# Altium PCB Main.PcbDoc
Units mm, origin at the board's own origin, x right, y up, seen from the top; angles counter-clockwise.
Board outline 50 x 50 mm, 2 copper layers (Top Layer, Bottom Layer), stack 1.135 mm thick; 24 components, 12 nets, 56 pads, 5 vias.
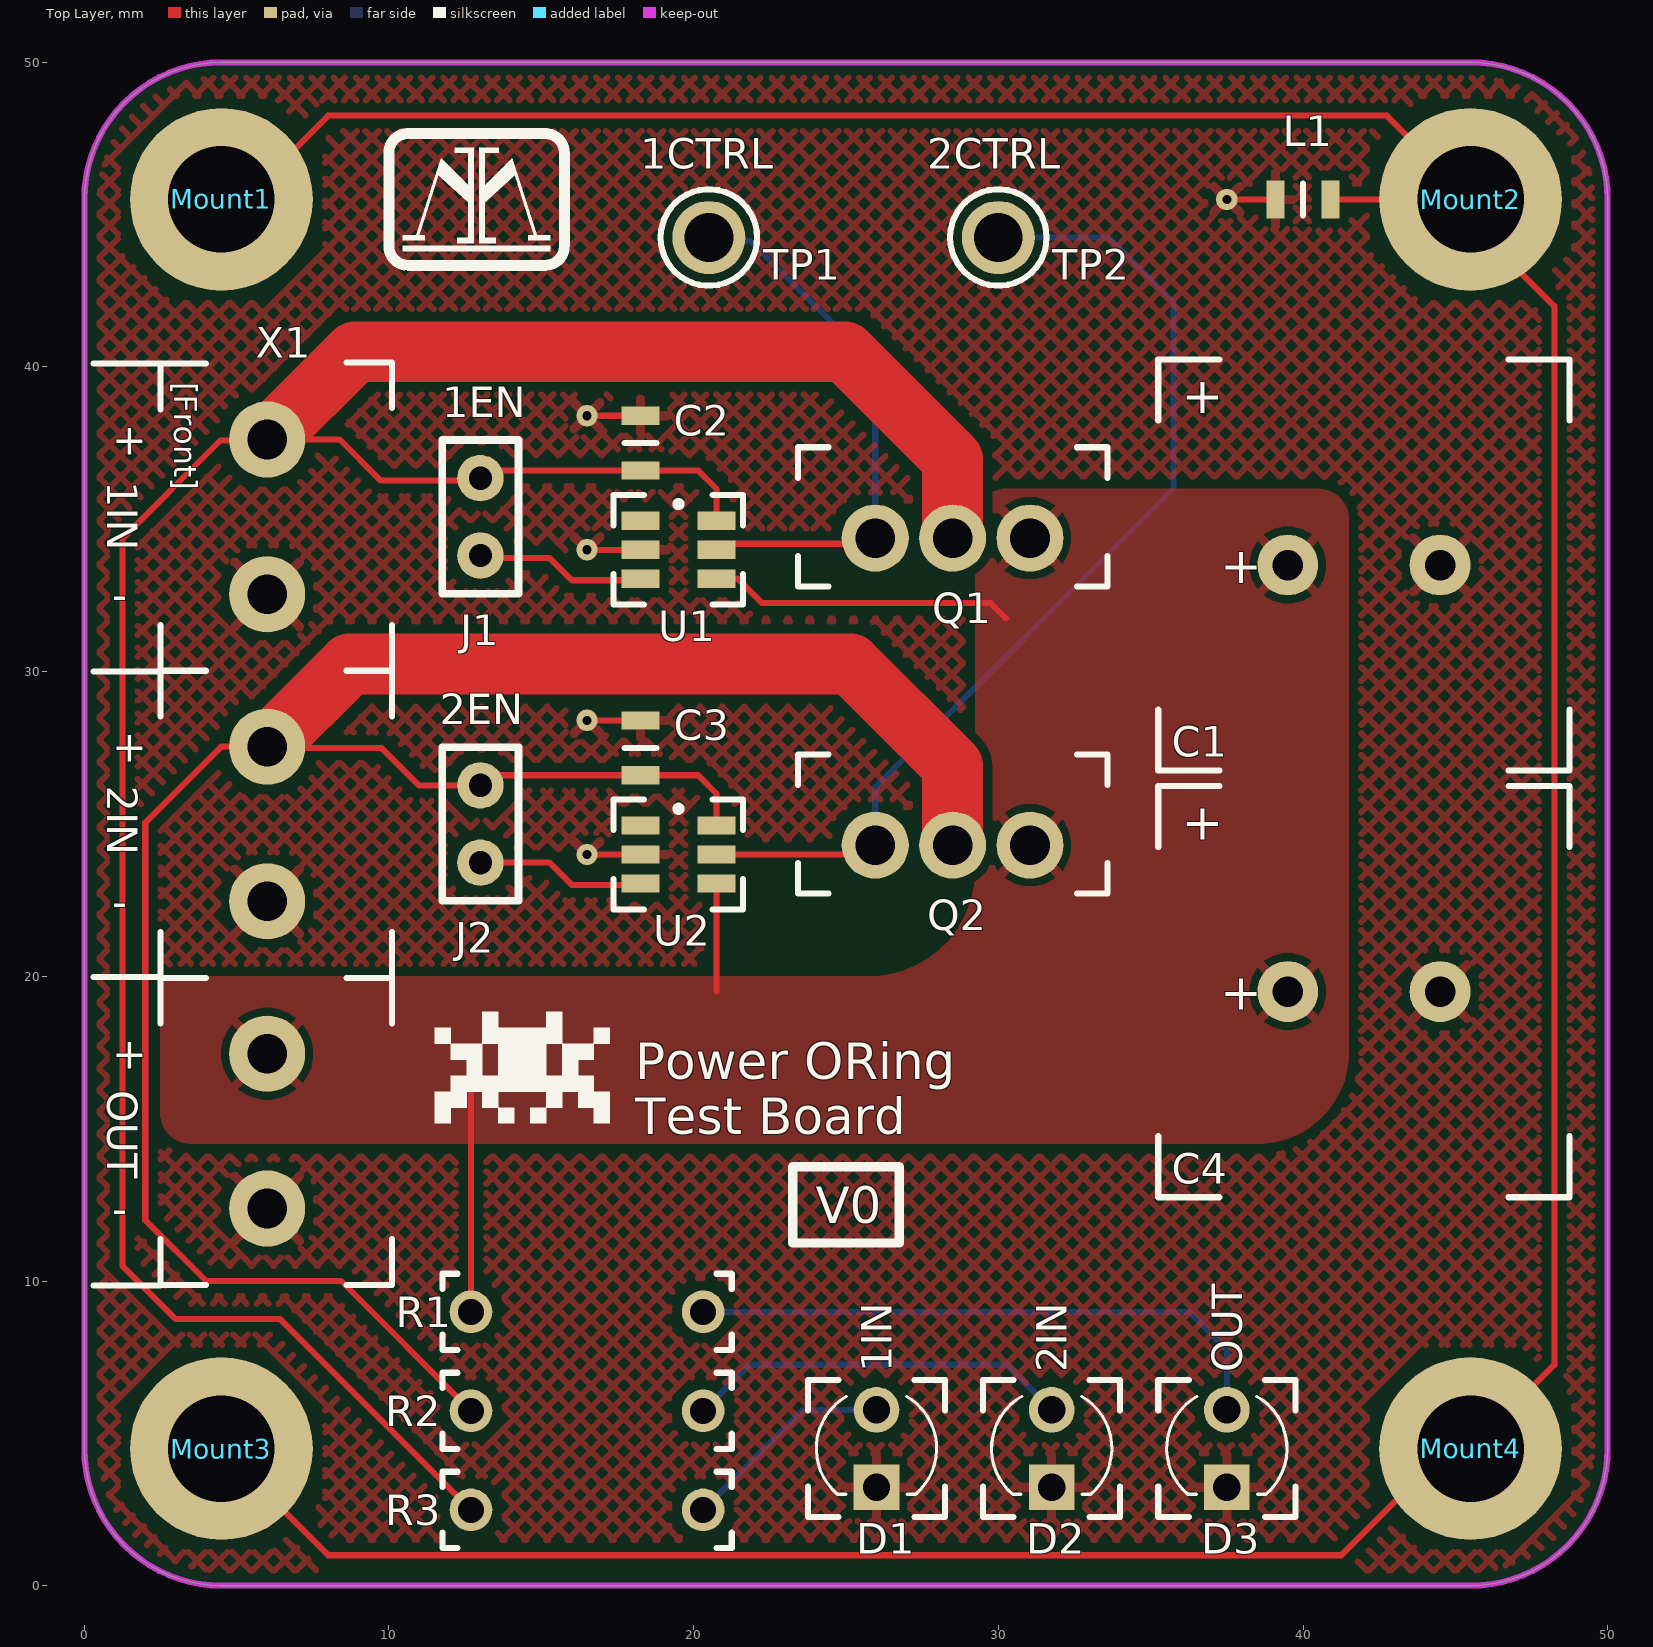
[diagram p0: Top Layer view]
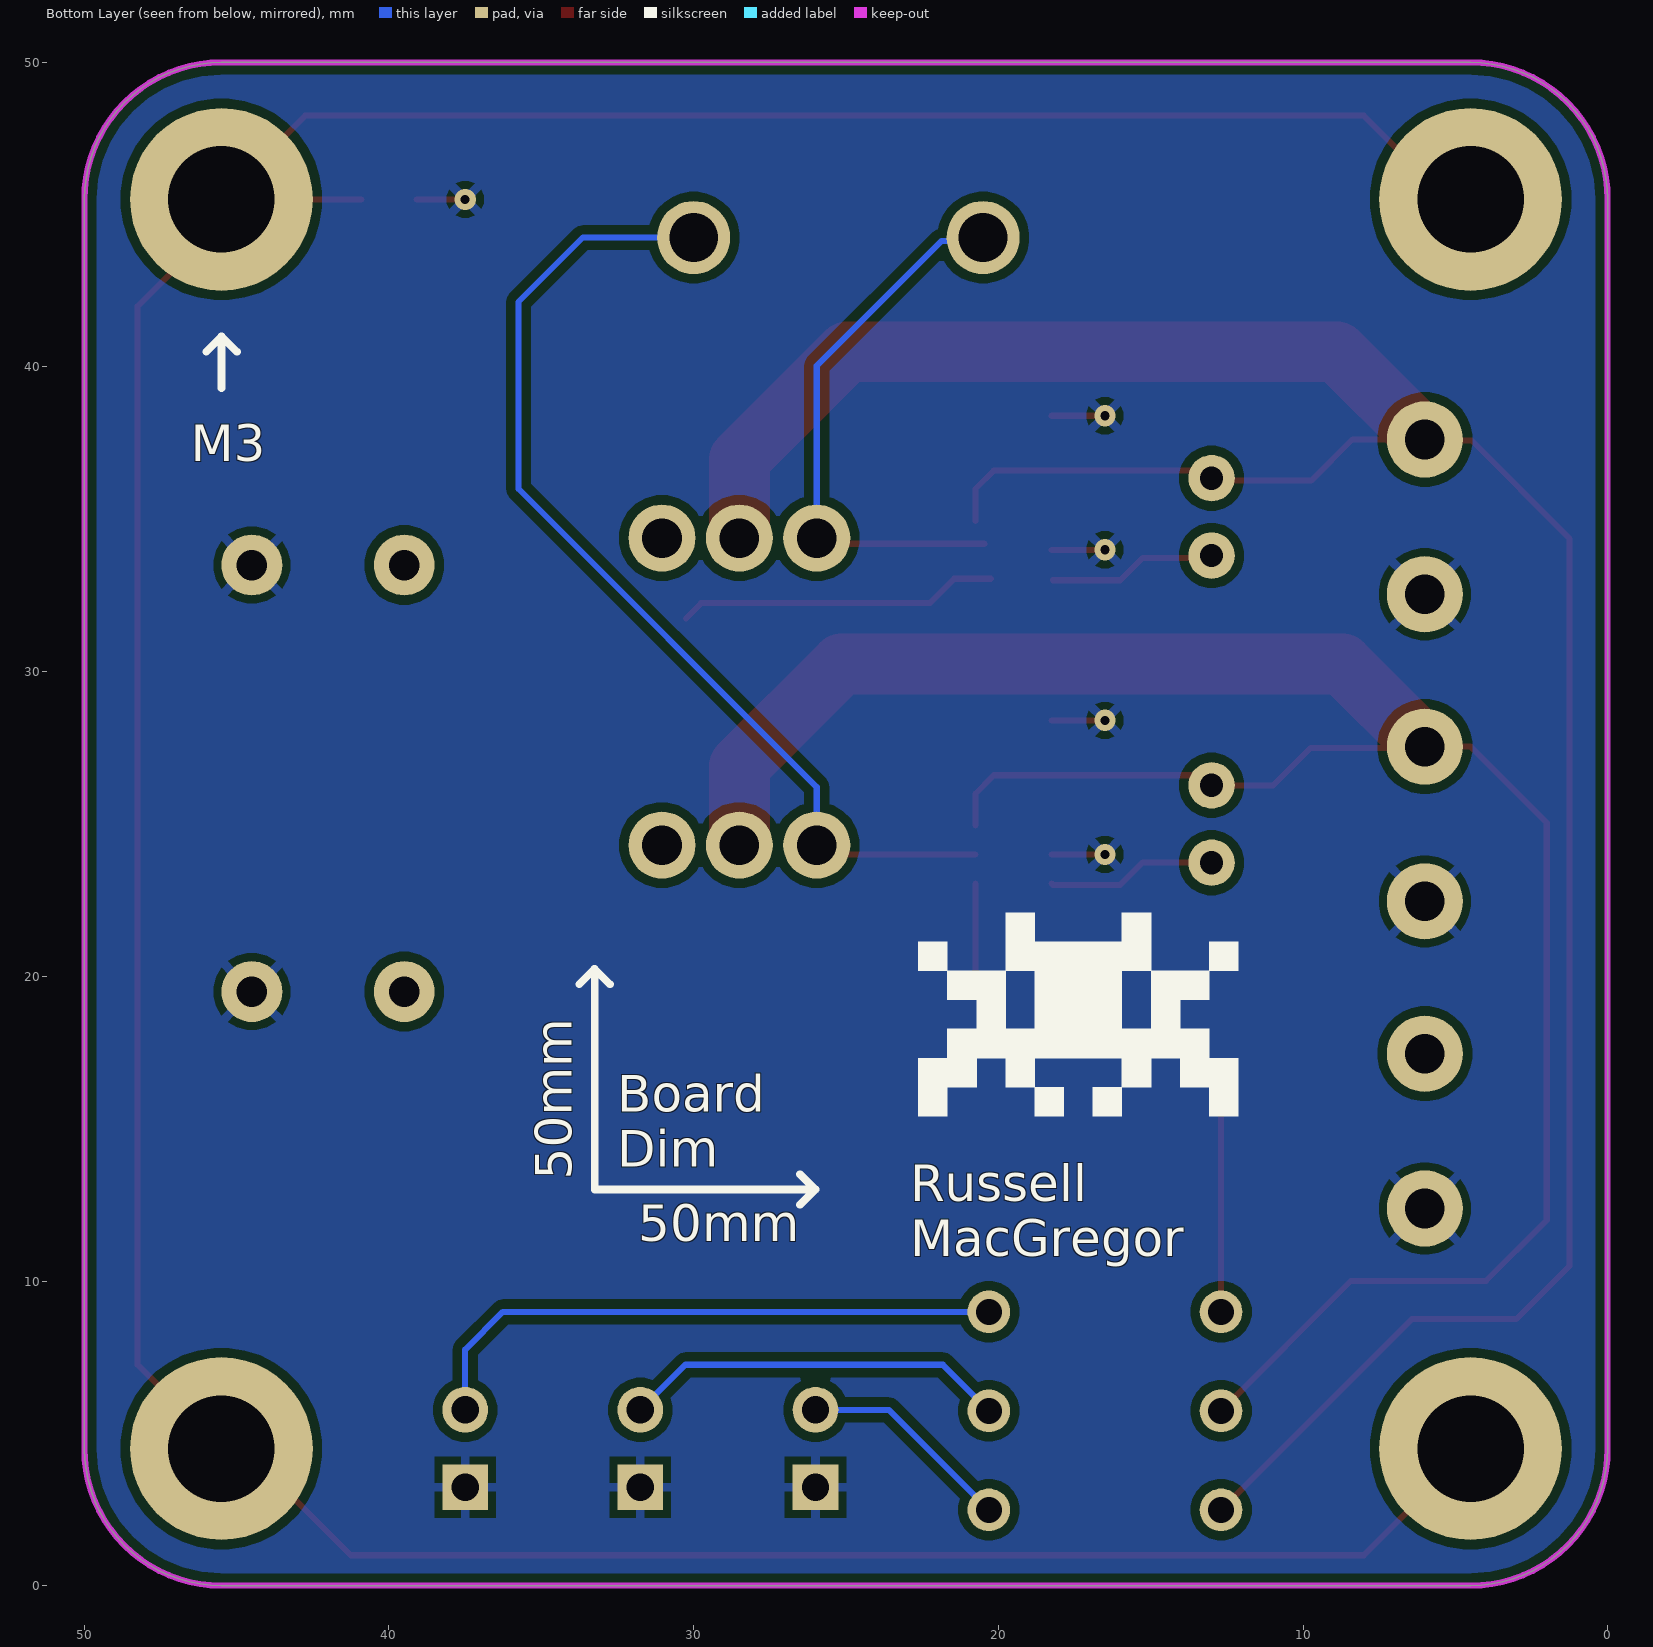
[diagram p1: Bottom Layer view, seen from below]

## Layer stack, top to bottom
Top Solder: solder mask 0.0102, Solder Resist, Dk 3.8
Top Layer: signal copper 0.035
Dielectric 1: dielectric 1.065, FR-4, Dk 4.8
Bottom Layer: signal copper 0.035
Bottom Solder: solder mask 0.0102, Solder Resist, Dk 3.8

## Board outline
4.5,0 cw(c4.5,4.5) 0,4.5 0,45.5 cw(c4.5,45.5) 4.5,50 45.5,50 cw(c45.5,45.5) 50,45.5 50,4.5 cw(c45.5,4.5) 45.5,0

## Design rules (kind name [scope] priority, off if disabled: settings)
BoardOutlineClearance [All] p1: gap=0.2 ignorepadtopadclearanceinfootprint=FALSE
Clearance "inPolygon Clearance" [InPolygon] p1: gap=0.3 ignorepadtopadclearanceinfootprint=TRUE // this rule ensures that every net within a polygon of a different net has a set clearance from the poly
Clearance "Different Diff Pair" [All] p2: gap=0.2 ignorepadtopadclearanceinfootprint=TRUE
Clearance "Same Diff Pair" [All] p3: gap=0.1 ignorepadtopadclearanceinfootprint=TRUE
Clearance "Different Nets" [not InAnyDifferentialPair] p4: gap=0.3 ignorepadtopadclearanceinfootprint=TRUE except(0.1: Arc-SMDPad Arc-THPad Arc-Via Arc-Text Track-SMDPad Track-THPad Track-Via Track-Text SMDPad-Text THPad-Text Via-Text Fill-Text Poly-Text Region-Text Text-Text; 0.12: Arc-Arc Arc-Track Track-Track; 0.15: SMDPad-SMDPad SMDPad-THPad SMDPad-Via THPad-THPad THPad-Via Via-Via; 0.2: Arc-Hole Track-Hole SMDPad-Hole THPad-Hole Via-Hole Fill-Hole Poly-Hole Region-Hole Text-Hole)
Clearance "Same Net" [not InAnyDifferentialPair] p5: gap=0 ignorepadtopadclearanceinfootprint=TRUE except(0.1: THPad-Via; 0.18: Arc-Arc Arc-Track Track-Track)
ComponentClearance [All] p1: gap=0.102 collisioncheckmode=3 verticalgap=0.102 showdistances=TRUE
DiffPairsRouting "Ethernet Routing" [InDifferentialPairClass('Ethernet_Pairs')] p1: maxlimit=0.2 minlimit=0.2 mostfreqgap=0.2 toplayer_minwidth=0.25 toplayer_maxwidth=0.25 toplayer_prefwidth=0.25 bottomlayer_minwidth=0.25 bottomlayer_maxwidth=0.25 bottomlayer_prefwidth=0.25 impedanceprofiledriven=TRUE maxuncoupledlength=12.7
DiffPairsRouting "USB Routing" [InDifferentialPairClass('USB_Pairs')] p2: maxlimit=0.127 minlimit=0.127 mostfreqgap=0.127 toplayer_minwidth=0.23 toplayer_maxwidth=0.23 toplayer_prefwidth=0.23 bottomlayer_minwidth=0.23 bottomlayer_maxwidth=0.23 bottomlayer_prefwidth=0.23 maxuncoupledlength=12.7
DiffPairsRouting "CAN Routing" [InDifferentialPairClass('CAN_Pairs')] p3: maxlimit=0.5 minlimit=0.5 mostfreqgap=0.5 toplayer_minwidth=0.201 toplayer_maxwidth=0.201 toplayer_prefwidth=0.201 bottomlayer_minwidth=0.201 bottomlayer_maxwidth=0.201 bottomlayer_prefwidth=0.201 impedanceprofiledriven=TRUE maxuncoupledlength=12.7
Height [All] p1: minheight=0 maxheight=1816.048 prefheight=12.7
HoleSize [All] p1: absolutevalues=TRUE maxlimit=6.3 minlimit=0.3 maxpercent=80.000 minpercent=20.000
HoleToHoleClearance [All] p1: gap=0.25 allowstackedmicrovias=FALSE
Length [All] p1: maxlimit=43.432 minlimit=0 usedelayunits=TRUE mindelay=0.000000 maxdelay=10000.000000
MatchedLengths "Diff Pair Matched Delays" [InDifferentialPairClass('Ethernet_Pairs') or InDifferentialPairClass('USB_Pairs') or InDifferentialPairClass('CAN_Pairs')] p1: tolerance=5 checknetsindiffpair=TRUE checkdiffpairvsdiffpair=FALSE checkxsignals=FALSE checkothers=FALSE usedelayunits=TRUE delaytolerance=100.000000
MinimumAnnularRing [All] p1: minimumring=0.2
MinimumSolderMaskSliver [All] p1: minsoldermaskwidth=0
PlaneClearance "Supply Net Clearance" [InNetClass('Supply_Nets')] p1: clearance=0.5
PlaneClearance "All Nets" [All] p2: clearance=0.3
PolygonConnect "Supply Nets" [InNetClass('Supply_Nets')] p1: connectstyle=Relief reliefconductorwidth=0.3 reliefentries=4 polygonreliefangle="90 Angle" conductorbypadedge=TRUE mindistance=0.381 enablemindistance=FALSE airgapwidth=0.254
PolygonConnect General [All] p2: connectstyle=Relief reliefconductorwidth=0.254 reliefentries=4 polygonreliefangle="90 Angle" airgapwidth=0.254
RoutingVias [All] p1: holewidth=0.2 width=0.35 viastyle="Through Hole" minholewidth=0.15 minwidth=0.3 maxholewidth=6.3 maxwidth=6.55
SilkToSilkClearance [All] p1: silktosilkclearance=0
SilkToSolderMaskClearance [All] p1: minsilkscreentomaskgap=0 clearancetoexposedcopper=TRUE
SolderMaskExpansion [All] p1: expansion=0.075 istentingtop=FALSE
SupplyNets "Schematic Supply Nets_3" [InNet('GND')] p1: voltage=0.000
SupplyNets "Schematic Supply Nets_1" [InNet('Earth')] p2: voltage=0.000
UnRoutedNet [All] p1: checkbadconnections=TRUE
Width "nRF Width" [InNetClass('nRF Signal')] p1: maxlimit=0.379 minlimit=0.379 preferedwidth=0.379 impedanceprofiledriven=TRUE minimp=50.000000 maximp=50.000000 favimp=50.000000 checkconnectedcopper=TRUE
Width [All] p2: maxlimit=100 minlimit=0.1 preferedwidth=0.3
20 further rules are at their usual default settings.

## Classes and differential pairs
net class Supply_Nets: "Batt1 EN" "Batt1 IN+" "Batt2 EN" "Batt2 IN+" "Batt OUT" Earth GND NetQ1_1 NetQ2_1

## Components (designator, comment, footprint, x,y, rotation, side; value= is the part's Value field where it differs from the comment)
C1 "[Cap] Thru-Hole 1000uF 20% 35V" "[Cap] Thru-Hole Polarized 10mm" 42,33.5 r0 top
C2 "[Cap] 0805 0.1uF 10% 50V" "[Cap] SMD 0805" 18.25,37.5 r90 top (schematic designator C4)
C3 "[Cap] 0805 0.1uF 10% 50V" "[Cap] SMD 0805" 18.25,27.5 r90 top (schematic designator C2)
C4 "[Cap] Thru-Hole 1000uF 20% 35V" "[Cap] Thru-Hole Polarized 10mm" 42,19.5 r0 top (schematic designator C3)
D1 "[LED] Thru-Hole 3mm Green" "[LED] Thru-Hole 3mm" 26,4.5 r270 top
D2 "[LED] Thru-Hole 3mm Green" "[LED] Thru-Hole 3mm" 31.75,4.5 r270 top
D3 "[LED] Thru-Hole 3mm Green" "[LED] Thru-Hole 3mm" 37.5,4.5 r270 top
J1 "[Jumper] Thru-Hole 2pin" "[Jumper] Thru-Hole 2pin" 13,33.81 r90 top
J2 "[Jumper] Thru-Hole 2pin" "[Jumper] Thru-Hole 2pin" 13,23.73 r90 top
L1 "652-MH2029-300Y" "[Ferrite] SMD 0805" 40,45.5 r180 top
Mount1 "M3 Mount Hole" "[Mount] M3 Mount Hole" 4.5,45.5 r0 top
Mount2 "M3 Mount Hole" "[Mount] M3 Mount Hole" 45.5,45.5 r0 top
Mount3 "M3 Mount Hole" "[Mount] M3 Mount Hole" 4.5,4.5 r0 top
Mount4 "M3 Mount Hole" "[Mount] M3 Mount Hole" 45.5,4.5 r0 top
Q1 "NMOS" "[NMOS] Thru-Hole 40V 200A" 28.5,34.385 r0 top
Q2 "NMOS" "[NMOS] Thru-Hole 40V 200A" 28.5,24.305 r0 top
R1 "[220] Thru-Hole 5% 1/4W" "[Res] Thru-Hole 1/4W" 16.5,8.988 r0 top (schematic designator R3)
R2 "[220] Thru-Hole 5% 1/4W" "[Res] Thru-Hole 1/4W" 16.5,5.738 r0 top
R3 "[220] Thru-Hole 5% 1/4W" "[Res] Thru-Hole 1/4W" 16.5,2.488 r0 top (schematic designator R1)
TP1 "[THM] Thru-Hole" "[THM] White" 20.5,44.25 r0 top
TP2 "[THM] Thru-Hole" "[THM] White" 30,44.25 r0 top
U1 "[ORing] NMOS Controller" "[ORing] NMOS Controller" 19.5,34 r0 top
U2 "[ORing] NMOS Controller" "[ORing] NMOS Controller" 19.5,24 r0 top
X1 "6pin Screw Terminal" "[Screw Terminal] 6pin 5mm" 6,25 r270 top

## Footprints (in the part's own frame and the unit in brackets; to place one, negate y for a bottom-side part, rotate by r counter-clockwise, add the part's x,y. Pads: shape width x height; smd on the part's side, far side on the other; paste and mask are expansions set on the pad)
"[Cap] SMD 0805" [mm]
  rect 0.6x1.25 smd: 1(-0.9,0) 2(0.9,0)
  silkscreen extent 0,-0.53 0,0.53, body extent -1,-0.63 1,0.63, height 1
"[Cap] Thru-Hole Polarized 10mm" [mm]
  round 2 hole 1: 1(-2.5,0) 2(2.5,0)
  silkscreen extent -6.75,-6.75 6.75,6.75, body extent -6.5,-6.49 6.5,6.49, height 26.5
"[Ferrite] SMD 0805" [mm]
  rect 0.6x1.25 smd: 1(-0.9,0) 2(0.9,0)
  silkscreen extent 0,-0.53 0,0.53, body extent -1,-0.6 1,0.6, height 1.1
"[Jumper] Thru-Hole 2pin" [mil]
  round 60 hole 30: 1(0,0) 2(100,0)
  silkscreen extent -49,-49 149,49, body extent -50,-50 150,50, height 374
"[LED] Thru-Hole 3mm" [mm]
  round 1.5 hole 0.9: 1(-1.27,0)
  rect 1.5x1.5 hole 0.9: 2(1.27,0)
  silkscreen extent -2.25,-2.25 2.25,2.25, body extent -1.9,-1.92 1.68,1.92, height 5.6
"[Mount] M3 Mount Hole" [mm]
  round 6 hole 3.5: 1(0,0)
"[NMOS] Thru-Hole 40V 200A" [mm] "CSD18510KCS"
  round 2.2 hole 1.3: 1(-2.54,0) 2(0,0) 3(2.54,0)
  silkscreen extent -5.08,-1.59 5.08,2.98, body extent -5.08,-1.59 5.08,2.98, height 19.35
"[ORing] NMOS Controller" [mm]
  rect 1.25x0.6 smd: 1(-1.25,0.95) 2(-1.25,0) 3(-1.25,-0.95) 4(1.25,-0.95) 5(1.25,0) 6(1.25,0.95)
  silkscreen extent -2.12,-1.8 2.12,1.8, body extent -1.38,-1.5 1.38,1.5, height 1.1
"[Res] Thru-Hole 1/4W" [mm]
  round 1.4 hole 0.85: 1(-3.81,0) 2(3.81,0)
  silkscreen extent -4.75,-1.25 4.75,1.25, body extent -4.11,-1.19 4.11,1.19, height 2.7
"[Screw Terminal] 6pin 5mm" [mm]
  round 2.5 hole 1.3: 1(-12.62,0) 2(-7.54,0) 3(-2.54,0) 4(2.54,0) 5(7.54,0) 6(12.62,0)
  silkscreen extent -15.15,-3.5 15.13,4.1, body extent -15.53,-3.5 15.13,4.1, height 9.99
"[THM] White" [mm] "5012"
  round 2.4 hole 1.6: 1(0,0)
  silkscreen extent -1.59,-1.58 1.59,1.58, body extent -1.58,-1.59 1.58,1.59, height 8.12

## Part data
C1 C4: "35PK1000MEFC10X20", Capacitance=1000uF, Max Voltage=35V, Size Package=Thru-Hole, Supplier Part Number 1=399-9886-1-ND, Tolerance=20%, Supplier 1=DigiKey
C2 C3: "CL21B104KBCNNNC", Capacitance=100nF, Max Voltage=50V, Size Package=0805, Supplier Part Number 1=1276-1003-6-ND, Tolerance=10%, Supplier 1=DigiKey
D1 D2 D3: "151031VS06000", Color=Green, Supplier Part Number 1=732-5008-ND, Lens Diameter=3mm, Supplier 1=DigiKey
L1: library part "[Ferrite] SMD 0805 3A 30ohm", Res @ Freq="30 @ 100MHz", Size Package=0805, Supplier Part Number 1=MH2029-300YCT-ND, Supplier 1=DigiKey
Mount1 Mount2 Mount3 Mount4: library part "[Mount] M3 Mount Hole", "Place at least 4.5mm from board edge. Plated."
Q1 Q2: library part "[NMOS] Thru-Hole 40V 200A", "CSD18510KCS", Supplier Part Number 1=296-47695-ND, Supplier 1=DigiKey
R1 R2 R3: "CFR-25JR-52-220R", Resistance=220, Size Package=Thru-Hole, Supplier Part Number 1=13-CFR-25JR-52-220RCT-ND, Tolerance=5%, Supplier 1=DigiKey, Wattage=1/4W
TP1 TP2: "5012", Supplier Part Number 1=36-5012-ND, Supplier 1=DigiKey
U1 U2: "NCV68061SNAIT1G", Supplier Part Number 1=488-NCV68061SNAIT1GCT-ND, Supplier 1=DigiKey
X1: library part "[Screw Terminal] 6pin", "TB002-500-06BE", Supplier Part Number 1=102-6149-ND, Supplier 1=DigiKey

## Via types
v1: diameter 0.7, hole 0.3, Top Layer to Bottom Layer, 5 vias

## Nets (pads, with @x,y where several pads share a name; then routed paths per layer and width w, separated by ;. In a path a pad name is that pad's centre, name@x,y a point inside that pad or via, vN(x,y) a via of type N, cw(c..) or ccw(c..) an arc to the next point about the centre after c; other vN are vias at no path point)
"Batt1 EN": J1.1 U1.3 | length 5.5
  Top Layer w0.2: J1.1@13,33.73 15.27,33.73 16,33 U1.3@18.2,33
"Batt1 IN+": C2.1 J1.2 Q1.2 R3.1 U1.6 X1.1 | length 89.2
  Top Layer w0.2: R3.1 6.428,8.75 3,8.75 1.25,10.5 1.25,34.37 4.47,37.59 5.97,37.59 X1.1 8.38,37.62 9.73,36.27 J1.2@13,36.27 ; J1.2 13.25,36.6 C2.1 20.15,36.6 20.75,36 U1.6
  Top Layer w2: X1.1 8.88,40.5 24.966,40.5 28.5,36.966 Q1.2
"Batt2 EN": J2.1 U2.3 | length 5.6
  Top Layer w0.2: J2.1 15.27,23.73 16,23 18.2,23 U2.3
"Batt2 IN+": C3.1 J2.2 Q2.2 R2.1 U2.6 X1.3 | length 75.3
  Top Layer w0.2: R2.1 8.428,10 4,10 2,12 2,25.04 4.5,27.54 X1.3 6.04,27.5 9.75,27.5 10.98,26.27 J2.2 ; J2.2@13.358,26.27 13.688,26.6 C3.1 20.15,26.6 20.75,26 U2.6
  Top Layer w2: X1.3 8.71,30.25 25.151,30.25 28.5,26.901 Q2.2
"Batt OUT": C1.1 C4.1 Q1.3 Q2.3 R1.1 U1.4 U2.4 X1.5 | length 21.4
  Top Layer w0.2: R1.1 12.69,16.19 12.75,16.25 ; U1.4@20.25,33.05 21.45,33.05 22.25,32.25 29.75,32.25 30.25,31.75 ; 20.75,19.5 U2.4
Earth: L1.1 Mount1.1 Mount2.1 Mount3.1 Mount4.1 | length 135.1
  Top Layer w0.2: Mount3.1 8,1 41.25,1 44.75,4.5 Mount4.1 48.25,7.25 48.25,42 45.5,44.75 Mount2.1 ; Mount1.1 5.25,45.5 8,48.25 42.75,48.25 Mount2.1 ; L1.1 Mount2.1
GND: C1.2 C2.2 C3.2 C4.2 D1.2 D2.2 D3.2 L1.2 U1.2 U2.2 X1.2 X1.4 X1.6 | length 8.6
  Top Layer w0.2: v1(16.5,24) U2.2 ; v1(16.5,28.4) C3.2 ; v1(16.5,34) U1.2 ; v1(16.5,38.4) C2.2 ; v1(37.5,45.5) L1.2
NetD1_1: D1.1 R3.2 | length 7
  Bottom Layer w0.2: R3.2 23.592,5.77 D1.1
NetD2_1: D2.1 R2.2 | length 12.7
  Bottom Layer w0.2: R2.2 21.822,7.25 30.27,7.25 D2.1
NetD3_1: D3.1 R1.2 | length 19.7
  Bottom Layer w0.2: R1.2 36.262,8.988 37.5,7.75 D3.1
NetQ1_1: Q1.1 TP1.1 U1.5 | length 18.1
  Top Layer w0.2: U1.5@20.45,34.2 Q1.1@25.355,34.2
  Bottom Layer w0.2: TP1.1 20.881,44.631 21.381,44.131 21.869,44.131 25.96,40.04 Q1.1
NetQ2_1: Q2.1 TP2.1 U2.5 | length 33.8
  Top Layer w0.2: U2.5 25.655,24 Q2.1
  Bottom Layer w0.2: Q2.1 25.96,26.21 35.75,36 35.75,42.139 33.639,44.25 TP2.1
pads on no net: U1.1 U2.1

## Polygon pours and split planes (outlines as drawn)
GND on Top Layer "GND Top Poly" (hatched 45Degree grid 0.508 track 0.203, remove dead copper, pour order 2): 0,0 50,0 50,50 0,50
"Batt OUT" on Top Layer "Batt Out Top Poly" (solid, remove dead copper, pour order 0): 3,20 25.75,20 ccw(c25.75,23.5) 29.25,23.5 29.25,35 cw(c30.25,35) 30.25,36 40.5,36 cw(c40.5,35) 41.5,35 41.5,17.5 cw(c38.5,17.5) 38.5,14.5 3.5,14.5 cw(c3.5,15.5) 2.5,15.5 2.5,19.5 cw(c3,19.5)
GND on Bottom Layer "GND Bottom Poly" (solid, remove dead copper, pour order 1): 0,0 50,0 50,50 0,50

## Keep-outs
Keep-Out Layer:
  the board outline again, w0.2

## Silkscreen, mask and mechanical layers (free items; w line width, h text height)
Top Overlay:
  drawing of 17 lines, arcs and shapes, not listed
  text "1CTRL" at 18.251,46.5 h1
  text "2CTRL" at 27.667,46.5 h1
  text "1EN" at 11.75,38.35 h1
  text "+" at 0.917,37.12 h1
  text "1IN" at 0.75,36.246 h1 r270
  text "-" at 0.917,32.04 h1
  text "2EN" at 11.667,28.27 h1
  text "+" at 0.917,27.04 h1
  text "2IN" at 0.75,26.25 h1 r270
  text "-" at 0.917,21.96 h1
  text "+" at 0.917,16.96 h1
  text "OUT" at 0.75,16.253 h1 r270
  text "Power ORing / Test Board" at 18.077,14.82 h1.2
  text "V0" at 24,11.9 h1.2
  text "-" at 0.917,11.88 h1
  text "1IN" at 26.5,7 h1 r90
  text "2IN" at 32.25,7 h1 r90
  text "OUT" at 38,7 h1 r90
Bottom Overlay:
  region: 16.3,15.409 15.943,15.409 15.943,16.363 16.896,16.363 16.896,16.362 16.898,16.362 16.898,15.409 16.301,15.409
  region: 12.125,20.869 12.125,21.136 13.078,21.136 13.078,21.135 13.079,21.135 13.079,20.182 12.125,20.182 12.125,20.867
  region: 21.67,20.476 21.67,21.135 21.671,21.135 21.671,21.136 22.625,21.136 22.625,20.182 21.67,20.182 21.67,20.474
  region: 18.807,16.287 18.807,15.409 17.852,15.409 17.852,16.362 17.853,16.362 17.853,16.363 18.807,16.363 18.807,16.289
  region: 15.005,22.091 15.943,22.091 15.943,21.136 18.807,21.136 18.807,22.091 19.761,22.091 19.761,20.182 18.807,20.182 18.807,18.272 19.761,18.272 19.761,20.182 21.67,20.182 21.67,19.228 21.669,19.228 21.669,19.227 20.716,19.227 20.716,18.272 21.669,18.272 21.669,18.271 21.67,18.271 21.67,17.318 22.625,17.318 22.625,15.409 21.67,15.409 21.67,16.363 20.717,16.363 20.717,16.365 20.716,16.365 20.716,17.318 19.761,17.318 19.761,16.365 19.76,16.365 19.76,16.363 18.807,16.363 18.807,17.318 15.943,17.318 15.943,16.363 14.99,16.363 14.99,16.365 14.988,16.365 14.988,17.318 14.034,17.318 14.034,16.365 14.033,16.365 14.033,16.363 13.079,16.363 13.079,15.409 12.125,15.409 12.125,17.318 13.079,17.318 13.079,18.271 13.081,18.271 13.081,18.272 14.034,18.272 14.034,19.227 13.081,19.227 13.081,19.228 13.079,19.228 13.079,20.182 14.988,20.182 14.988,18.272 15.943,18.272 15.943,20.182 14.988,20.182 14.988,22.091 15.004,22.091
  lines w0.254: 26,13.008 26.508,12.5 ; 26.508,13.508 26,13 33.25,13 33.25,20.25 33.758,19.742 ; 32.75,19.742 33.258,20.25 ; 44.992,40.5 45.5,41.008 45.5,39.308 ; 45.492,41.008 46,40.5
  text "M3" at 46.5,36.9 h1.2
  text "Board" at 32.5,15.55 h1.2
  text "Dim" at 32.5,13.75 h1.2
  text "50mm" at 34,13.326 h1.2 r270
  text "50mm" at 31.824,11.3 h1.2
  text "Russell / MacGregor" at 22.898,10.82 h1.2
Poly Planning:
  lines w0.2: 2.5,14.5 2.5,20 29.25,20 29.25,36 41.5,36 41.5,14.5 2.5,14.5

## Text inside footprints (layer, text, board x,y; h text height)
C1: Top Overlay "+" at 36.012,38.488 h1.2; Top Overlay "+" at 37.282,32.9 h1.2
C4: Top Overlay "+" at 37.282,18.9 h1.2; Top Overlay "+" at 36.012,24.488 h1.2
X1: Top Overlay "[Front]" at 2.958,39.502 h0.75 r270